# Altium PCB MIXR - Power.PcbDoc (part 3 of 4)
Units mm, origin at the board's own origin, x right, y up, seen from the top; angles counter-clockwise.
Board outline 109.43 x 109.43 mm, 2 copper layers (Top Layer, Bottom Layer), stack 1.569 mm thick; 131 components, 82 nets, 420 pads, 247 vias.
Unrouted connection lines stored in the file: 102.
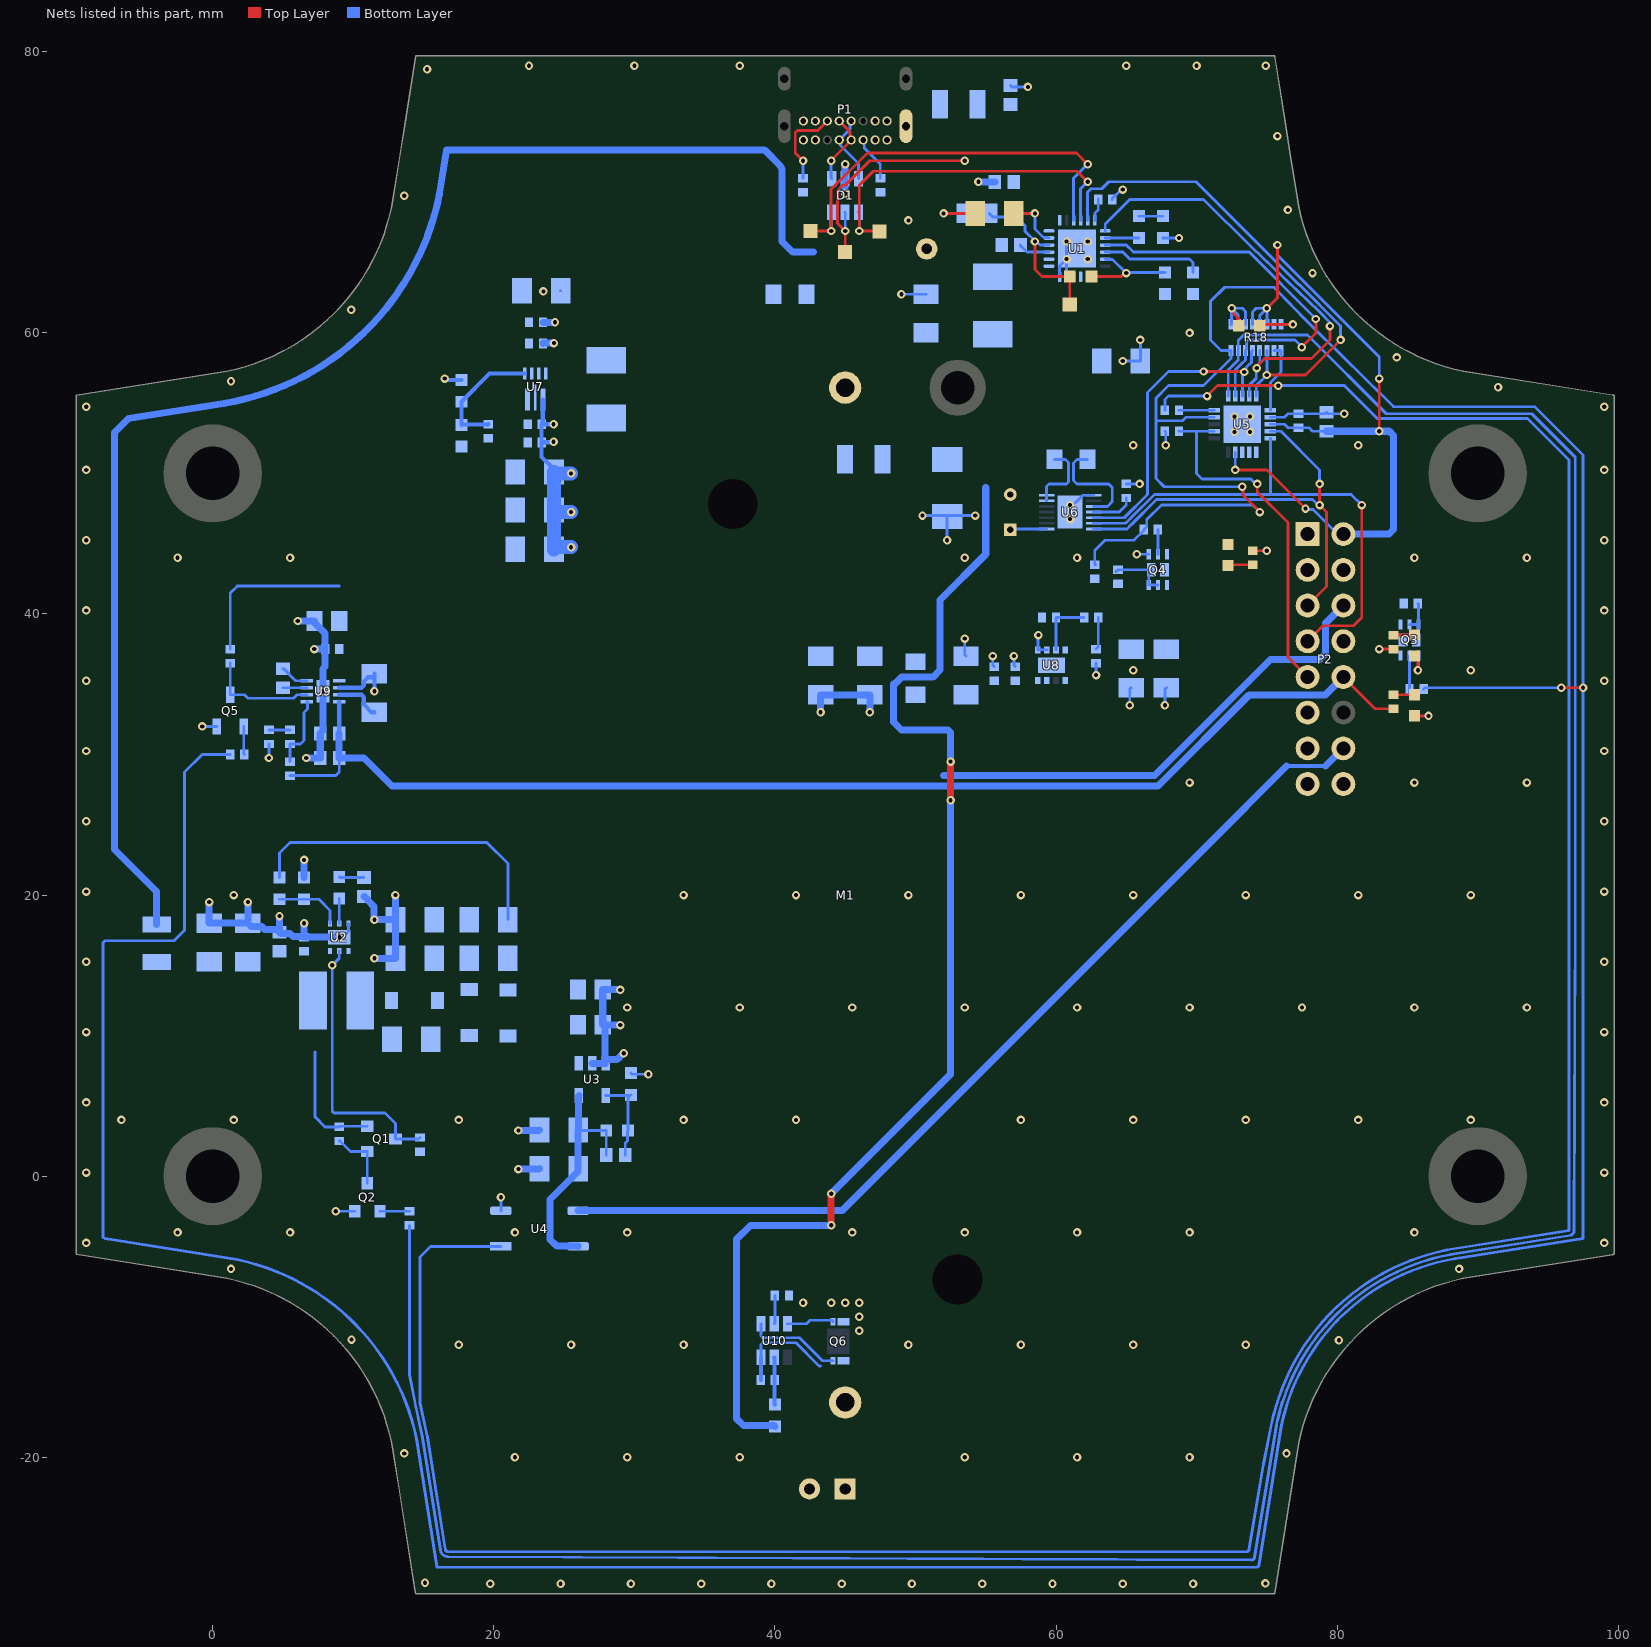
[diagram p2: the nets of this part, all layers, seen from the top]

## Part data (continued)
R25: "Thin Film Resistors - SMD 1/16W 100K ohm .1% 25ppm", Case Code (Imperial)=0402, Case Code (Metric)=1005, Manufacturer=Yageo, Manufacturer Part Number=RT0402BRD07100KL, Max Operating Temperature=125°C, Max Power Dissipation=63mW, Min Operating Temperature=-55°C, Power Rating=62.5mW, Resistance=100K, Supplier Part Number 1=YAG1343CT-ND, Temperature Coefficient=25ppm/°C, Tolerance=0.1%, Voltage Rating=50V, Case/Package=0402, Category="Chip SMD Resistors", ComponentLink1Description=https://datasheet.ciiva.com/12724/pyu-rt-1-to-0-05-rohs-l-4-12724954.pdf?src-supplier=Mouser, ComponentLink1URL=https://datasheet.ciiva.com/12724/pyu-rt-1-to-0-05-rohs-l-4-12724954.pdf?src-supplier=Mouser, Composition="Thin Film", Depth=0.5mm, Features="Moisture Resistant", Height=0.014inch, Lead Free="Lead Free", Length=0.039inch, Military Standard=Not, Number of Terminations=2, Packaging="Tape and Reel", Pricing 1="1=0.41000, 10=0.29200, 100=0.11690, 1000=0.05762, 2500=0.05338, 5000=0.04830 (USD)", RoHS=Yes, Stock 1=83152, Supplier 1=Digi-Key, Termination=SMD/SMT, Voltage Rating (DC)=50V, Width=0.02inch
R28 R36: "Thick Film Resistors 523K OHM 1%", Case Code (Imperial)=0402, Case Code (Metric)=1005, Manufacturer=Yageo, Manufacturer Part Number=RC0402FR-07523KL, Max Operating Temperature=155°C, Max Power Dissipation=63mW, Min Operating Temperature=-55°C, Power Rating=62.5mW, Resistance=523K, Supplier Part Number 1=YAG3177CT-ND, Temperature Coefficient=100ppm/°C, Tolerance=1%, Voltage Rating=50V, Case/Package=0402, Category="Chip SMD Resistors", ComponentLink1Description=https://datasheet.ciiva.com/8885/pyu-rc0402-51-rohs-l-6-8885398.pdf?src-supplier=Avnet, ComponentLink1URL=https://datasheet.ciiva.com/8885/pyu-rc0402-51-rohs-l-6-8885398.pdf?src-supplier=Avnet, ComponentLink2Description=https://datasheet.ciiva.com/16867/pyu-rc0402-51-rohs-l-6-16867910.pdf?src-supplier=Avnet+Europe, ComponentLink2URL=https://datasheet.ciiva.com/16867/pyu-rc0402-51-rohs-l-6-16867910.pdf?src-supplier=Avnet+Europe, ComponentLink3Description=https://datasheet.ciiva.com/12577/pyu-rc0402-51-rohs-l-6-r-12577464.pdf?src-supplier=Mouser, ComponentLink3URL=https://datasheet.ciiva.com/12577/pyu-rc0402-51-rohs-l-6-r-12577464.pdf?src-supplier=Mouser, ComponentLink4Description=https://datasheet.ciiva.com/28389/pyu-rc0402-51-rohs-l-6-28389900.pdf?src-supplier=Avnet+Europe, ComponentLink4URL=https://datasheet.ciiva.com/28389/pyu-rc0402-51-rohs-l-6-28389900.pdf?src-supplier=Avnet+Europe, Composition="Thick Film", Contact Plating=Tin,Matte, Depth=0.5mm, Features="Moisture Resistant", Height=0.016inch, Lead Free="Lead Free", Length=1mm, Military Standard=Not, Number of Terminations=2, Packaging="Tape and Reel", Pricing 1="1=0.10000, 10=0.01600, 100=0.00640, 1000=0.00289, 2500=0.00251, 5000=0.00207 (USD)", RoHS=Yes, Stock 1=24455, Supplier 1=Digi-Key, Termination=SMD/SMT, Voltage Rating (DC)=50V, Weight=2.3E-05oz, Width=0.5mm
R33 R34 R35: "YAGEO (PHYCOMP) - RC0402FR-074K7L - RES, THICK FILM, 4K7, 1%, 0.063W, 0402", Case Code (Imperial)=0402, Case Code (Metric)=1005, Manufacturer=Yageo, Manufacturer Part Number=RC0402FR-074K7L, Max Operating Temperature=155°C, Min Operating Temperature=-55°C, Power Rating=62.5mW, Resistance=4K7, Supplier Part Number 1=311-4.7KLRCT-ND, Temperature Coefficient=100ppm/°C, Tolerance=1%, Voltage Rating=50V, Case/Package=0402, Category="Chip SMD Resistors", ComponentLink1Description=https://datasheet.ciiva.com/7850/1018594-7850022.pdf?src-supplier=Element14, ComponentLink1URL=https://datasheet.ciiva.com/7850/1018594-7850022.pdf?src-supplier=Element14, ComponentLink2Description=https://datasheet.ciiva.com/7850/1018594-7850023.pdf?src-supplier=Element14, ComponentLink2URL=https://datasheet.ciiva.com/7850/1018594-7850023.pdf?src-supplier=Element14, ComponentLink3Description=https://datasheet.ciiva.com/15215/getdatasheetpartid-328119-15215035.pdf?src-supplier=Verical, ComponentLink3URL=https://datasheet.ciiva.com/15215/getdatasheetpartid-328119-15215035.pdf?src-supplier=Verical, ComponentLink4Description=https://datasheet.ciiva.com/22661/1686128-22661342.pdf?src-supplier=Element14, ComponentLink4URL=https://datasheet.ciiva.com/22661/1686128-22661342.pdf?src-supplier=Element14, Composition="Thick Film", Depth=0.5mm, Height=0.32mm, Lead Free="Lead Free", Length=1mm, Military Standard=Not, Number of Pins=2, Packaging="Tape and Reel", Pricing 1="1=0.10000, 10=0.01600, 100=0.00640, 1000=0.00289, 2500=0.00251, 5000=0.00207 (USD)", REACH SVHC="No SVHC", RoHS=Yes, Stock 1=11223879, Supplier 1=Digi-Key, Termination=SMD/SMT, Voltage Rating (DC)=50V, Width=0.5mm
R41: "330 Ohms ±1% 0.1W, 1/10W Chip Resistor 0603 (1608 Metric) Automotive AEC-Q200, Moisture Resistant Thick Film", Manufacturer="TE Connectivity", Manufacturer Part Number=330R, Supplier Part Number 1=A129682CT-ND, ComponentLink1Description=http://www.te.com/commerce/DocumentDelivery/DDEController?Action=srchrtrv&DocNm=1773204-3&DocType=DS&DocLang=English&src-supplier=Digi-Key, ComponentLink1URL=http://www.te.com/commerce/DocumentDelivery/DDEController?Action=srchrtrv&DocNm=1773204-3&DocType=DS&DocLang=English&src-supplier=Digi-Key, ComponentLink2Description=https://www.te.com/commerce/DocumentDelivery/DDEController?Action=srchrtrv&DocNm=1773204-3&DocType=DS&DocLang=English&src-supplier=Digi-Key, ComponentLink2URL=https://www.te.com/commerce/DocumentDelivery/DDEController?Action=srchrtrv&DocNm=1773204-3&DocType=DS&DocLang=English&src-supplier=Digi-Key, Pricing 1="1 = 0.10000, 10 = 0.03300, 100 = 0.01320, 1000 = 0.00595, 2500 = 0.00516 (USD)", RoHS=No, Stock 1=87700, Supplier 1=Digi-Key
R42: "2.7 kOhms ±1% 0.1W, 1/10W Chip Resistor 0402 (1005 Metric) Automotive AEC-Q200 Thick Film", Case Code (Imperial)=0402, Case Code (Metric)=1005, Manufacturer=Panasonic, Manufacturer Part Number=ERJ-2RKF2701X, Max Operating Temperature=155°C, Max Power Dissipation=100mW, Min Operating Temperature=-55°C, Package Quantity=1, Resistance=2K7, Supplier Part Number 1=P2.70KLCT-ND, Temperature Coefficient=100ppm/°C, Tolerance=1%, Voltage Rating=50V, Case/Package=0402, Category="Chip SMD Resistors", ComponentLink1Description=https://datasheet.ciiva.com/3883/3984280s8821682n1386-3883650.pdf?src-supplier=Arrow, ComponentLink1URL=https://datasheet.ciiva.com/3883/3984280s8821682n1386-3883650.pdf?src-supplier=Arrow, ComponentLink2Description=https://datasheet.ciiva.com/11821/0900766b80f80784-11821269.pdf?src-supplier=RSComponents, ComponentLink2URL=https://datasheet.ciiva.com/11821/0900766b80f80784-11821269.pdf?src-supplier=RSComponents, ComponentLink3Description=https://datasheet.ciiva.com/22668/1678782-22668310.pdf?src-supplier=Element14, ComponentLink3URL=https://datasheet.ciiva.com/22668/1678782-22668310.pdf?src-supplier=Element14, ComponentLink4Description=https://datasheet.ciiva.com/24071/aoa0000ce2-24071174.pdf?src-supplier=Mouser, ComponentLink4URL=https://datasheet.ciiva.com/24071/aoa0000ce2-24071174.pdf?src-supplier=Mouser, ComponentLink5Description=https://datasheet.ciiva.com/7802/aoa0000ce2-7802407.pdf?src-supplier=Element14, ComponentLink5URL=https://datasheet.ciiva.com/7802/aoa0000ce2-7802407.pdf?src-supplier=Element14, ComponentLink6Description=https://datasheet.ciiva.com/9196/aoa0000ce2-9196887.pdf?src-supplier=Avnet, ComponentLink6URL=https://datasheet.ciiva.com/9196/aoa0000ce2-9196887.pdf?src-supplier=Avnet, ComponentLink7Description=https://datasheet.ciiva.com/43467/1678782-43467351.pdf?src-supplier=Farnell, ComponentLink7URL=https://datasheet.ciiva.com/43467/1678782-43467351.pdf?src-supplier=Farnell, ComponentLink8Description=https://datasheet.ciiva.com/46372/1678782-46372856.pdf?src-supplier=Element14, ComponentLink8URL=https://datasheet.ciiva.com/46372/1678782-46372856.pdf?src-supplier=Element14, ComponentLink9Description=https://datasheet.ciiva.com/16775/70260748-16775161.pdf?src-supplier=Allied+Electronics, ComponentLink9URL=https://datasheet.ciiva.com/16775/70260748-16775161.pdf?src-supplier=Allied+Electronics, ComponentLink10Description=https://datasheet.ciiva.com/16778/70260748-16778345.pdf?src-supplier=Allied+Electronics, ComponentLink10URL=https://datasheet.ciiva.com/16778/70260748-16778345.pdf?src-supplier=Allied+Electronics, ComponentLink11Description=https://datasheet.ciiva.com/46372/1678782-46372857.pdf?src-supplier=Element14, ComponentLink11URL=https://datasheet.ciiva.com/46372/1678782-46372857.pdf?src-supplier=Element14, ComponentLink12Description=https://datasheet.ciiva.com/6138/aoa0000ce2-6138171.pdf?src-supplier=Farnell, ComponentLink12URL=https://datasheet.ciiva.com/6138/aoa0000ce2-6138171.pdf?src-supplier=Farnell, ComponentLink13Description=https://datasheet.ciiva.com/22687/1678782-22687069.pdf?src-supplier=Element14, ComponentLink13URL=https://datasheet.ciiva.com/22687/1678782-22687069.pdf?src-supplier=Element14, ComponentLink14Description=https://datasheet.ciiva.com/17213/aoa0000ce2-17213982.pdf?src-supplier=Avnet+Europe, ComponentLink14URL=https://datasheet.ciiva.com/17213/aoa0000ce2-17213982.pdf?src-supplier=Avnet+Europe, Composition="Thick Film", Contact Plating=Tin, Depth=0.5mm, Features="Automotive AEC-Q200", Height=0.35mm, Lead Free="Lead Free", Length=1mm, Military Standard=Not, Mount="Surface Mount", Number of Pins=2, Number of Terminations=2, Packaging="Tape and Reel", Power Rating=100mW, Pricing 1="1=0.10000, 10=0.04100, 100=0.01670, 1000=0.00751, 2500=0.00652, 5000=0.00538 (USD)", Radiation Hardening=No, REACH SVHC="No SVHC", RoHS=Yes, Stock 1=344590, Supplier 1=Digi-Key, Termination=SMD/SMT, Voltage Rating (DC)=50V, Width=0.02inch
RT1: library part "NTC THERMISTOR 10K 1% BEAD", "NTC Thermistor 10k Bead", B Value Tolerance=±1%, Manufacturer="Murata Electronics North America", Manufacturer Part Number=NXRT15XH103FA1B030, Operating Temperature="-40°C ~ 125°C", Package / Case=Bead, Resistance in Ohms @ 25°C=10k, Supplier Part Number 1=490-8601-ND, B0/50=-, B25/50=3380K, B25/75=-, B25/85=3434K, B25/100=3455K, Category="Sensors, Transducers", ComponentLink1Description=https://www.murata.com/~/media/webrenewal/support/library/catalog/products/thermistor/ntc/r44e.ashx, ComponentLink1URL=https://www.murata.com/~/media/webrenewal/support/library/catalog/products/thermistor/ntc/r44e.ashx, Length - Lead Wire=-, Mounting Type="Through Hole", Packaging=Bulk, Part Status=Active, Pricing 1="1=0.96, 5=0.91, 10=0.792, 25=0.696, 50=0.5784, 100=0.4925, 500=0.42834, 1000=0.3748, 5000=0.33197 (CAD)", Resistance Tolerance=±1%, RoHS="RoHS Compliant", Stock 1=25017, Supplier 1=Digi-Key
U1: "Charger IC Lithium Ion/Polymer 24-VQFN (4x4)", Manufacturer="Texas Instruments", Manufacturer Part Number=BQ25606RGER, Supplier Part Number 1=296-47743-1-ND, ComponentLink1Description=http://www.ti.com/lit/ds/symlink/bq25606.pdf?src-supplier=Digi-Key, ComponentLink1URL=http://www.ti.com/lit/ds/symlink/bq25606.pdf?src-supplier=Digi-Key, Number of Cells=1, Pricing 1="1 = 2.76000, 10 = 2.48100, 100 = 2.03260, 500 = 1.73032, 1000 = 1.45930 (USD)", RoHS=No, Stock 1=8983, Supplier 1=Digi-Key
U2: "Boost, Buck-Boost, Flyback, SEPIC Switching Regulator IC Positive Adjustable 3V 1 Output 960mA (Switch) 6-WDFN Exposed Pad", Case/Package=QFN, Manufacturer="Texas Instruments", Manufacturer Part Number=TPS61170DRVR, Max Input Voltage=18V, Max Operating Temperature=85°C, Max Output Current=960mA, Max Output Voltage=38V, Min Input Voltage=3V, Min Operating Temperature=-40°C, Nominal Supply Current=2.2mA, Output Current=1.2A, Package Quantity=1, Quiescent Current=2.3mA, Supplier Part Number 1=296-22945-1-ND, Switching Frequency=1.2MHz, Category="Voltage Regulators - Switching", ComponentLink1Description=https://datasheet.ciiva.com/7115/1764435-7115937.pdf?src-supplier=Newark, ComponentLink1URL=https://datasheet.ciiva.com/7115/1764435-7115937.pdf?src-supplier=Newark, ComponentLink2Description=https://datasheet.ciiva.com/41462/001014890-da-01-en-ic-reg-multi-con-tps61170drvr-wson-6-tid-41462735.pdf?src-supplier=Conrad, ComponentLink2URL=https://datasheet.ciiva.com/41462/001014890-da-01-en-ic-reg-multi-con-tps61170drvr-wson-6-tid-41462735.pdf?src-supplier=Conrad, ComponentLink3Description=https://datasheet.ciiva.com/2025/tps61170-2025720.pdf?src-supplier=Digi-Key, ComponentLink3URL=https://datasheet.ciiva.com/2025/tps61170-2025720.pdf?src-supplier=Digi-Key, ComponentLink4Description=https://datasheet.ciiva.com/2025/tps61170-2025721.pdf?src-supplier=Digi-Key, ComponentLink4URL=https://datasheet.ciiva.com/2025/tps61170-2025721.pdf?src-supplier=Digi-Key, ComponentLink5Description=https://datasheet.ciiva.com/15223/getdatasheetpartid-294050-15223093.pdf?src-supplier=Verical, ComponentLink5URL=https://datasheet.ciiva.com/15223/getdatasheetpartid-294050-15223093.pdf?src-supplier=Verical, ComponentLink6Description=https://datasheet.ciiva.com/2025/tps61170-2025719.pdf?src-supplier=Digi-Key, ComponentLink6URL=https://datasheet.ciiva.com/2025/tps61170-2025719.pdf?src-supplier=Digi-Key, Efficiency=93%, Lead Free="Lead Free", Min Output Voltage=3V, Number of Outputs=1, Number of Pins=6, Operating Supply Voltage=18V, Output Configuration=Positive, Output Type=Adjustable, Output Voltage=38V, Packaging="Tape and Reel", Pricing 1="1=2.14000, 10=1.92200, 25=1.81280, 100=1.45020, 250=1.26896, 500=1.23270, 1000=0.97891 (USD)", Radiation Hardening=No, REACH SVHC="No SVHC", RoHS=Yes, Stock 1=61005, Supplier 1=Digi-Key, Synchronous Rectifier=No, Topology=Boost
U3: "Linear Voltage Regulator IC 1 Output 20mA SOT-23-5", Manufacturer=Richtek, Manufacturer Part Number=RT9072BGB, Supplier Part Number 1=RT9072BGBCT-ND, ComponentLink1Description=http://www.richtek.com/assets/product_file/RT9072A=RT9072B/DS9072AB-01.pdf?src-supplier=Digi-Key, ComponentLink1URL=http://www.richtek.com/assets/product_file/RT9072A=RT9072B/DS9072AB-01.pdf?src-supplier=Digi-Key, ComponentLink2Description=https://www.richtek.com/assets/product_file/RT9072A=RT9072B/DS9072AB-01.pdf?src-supplier=Digi-Key, ComponentLink2URL=https://www.richtek.com/assets/product_file/RT9072A=RT9072B/DS9072AB-01.pdf?src-supplier=Digi-Key, Pricing 1="1=1.34000, 10=1.19700, 25=1.13640, 100=0.87250, 250=0.77104, 500=0.73048, 1000=0.56815 (USD)", RoHS=No, Stock 1=495, Supplier 1=Digi-Key
U4: library part "RELAY SOLID STATE CPC1017N SPST 100mA", "Relay Solid-State SPST-NO 4-SOP", Manufacturer="IXYS Integrated Circuits Division", Manufacturer Part Number=CPC1017NTR, On-State Resistance (Max)="16 Ohm", Package / Case="4-SOP (0.150\", 3.81mm)", Supplier Device Package="4-SOP (2.54mm)", Supplier Part Number 1=CLA233CT-ND, Voltage - Input=1.2VDC, Voltage - Load="0 ~ 60 V", Category=Relays, Circuit="SPST-NO (1 Form A)", ComponentLink1Description=http://www.ixysic.com/home/pdfs.nsf/www/CPC1017N.pdf/$file/CPC1017N.pdf, ComponentLink1URL=http://www.ixysic.com/home/pdfs.nsf/www/CPC1017N.pdf/$file/CPC1017N.pdf, Mounting Type="Surface Mount", Output Type="AC, DC", Packaging="Cut Tape (CT)", Part Status=Active, Pricing 1="1=1.76, 10=1.561, 25=1.41, 100=1.2334, 250=1.0824, 500=0.95658, 1000=0.75519 (CAD)", Relay Type=Relay, RoHS="RoHS Compliant", Stock 1=86929, Supplier 1=Digi-Key, Termination Style="Gull Wing"
U5: library part "IC I/O EXPANDER I2C 8CH 20 QFN", "I/O Expander 8 I²C 1.7MHz 20-QFN-EP (4x4)", Case/Package=QFN, Frequency=1.7MHz, Manufacturer 1=Microchip, Manufacturer Part Number 1=MCP23008T-E/ML, Max Operating Temperature=125°C, Min Operating Temperature=-40°C, Operating Supply Voltage=5.5V, Package Quantity=3300, Power Dissipation=700mW, Supplier Part Number 1=MCP23008T-E/MLCT-ND, ComponentLink1Description=http://www.microchip.com/mymicrochip/filehandler.aspx?ddocname=en021920, ComponentLink1URL=http://www.microchip.com/mymicrochip/filehandler.aspx?ddocname=en021920, ComponentLink2Description=https://datasheet.ciiva.com/16617/21919e-16617627.pdf?src-supplier=Avnet+Europe, ComponentLink2URL=https://datasheet.ciiva.com/16617/21919e-16617627.pdf?src-supplier=Avnet+Europe, ComponentLink3Description=https://datasheet.ciiva.com/12267/21919e-12267580.pdf?src-supplier=Mouser, ComponentLink3URL=https://datasheet.ciiva.com/12267/21919e-12267580.pdf?src-supplier=Mouser, ComponentLink4Description=https://datasheet.ciiva.com/8128/21919e-8128685.pdf?src-supplier=Avnet, ComponentLink4URL=https://datasheet.ciiva.com/8128/21919e-8128685.pdf?src-supplier=Avnet, Interface=I2C,Serial, Lead Free="Lead Free", Max Frequency=1.7MHz, Number of I/Os=8, Packaging="Tape and Reel", Pricing 1="1=1.10000, 25=0.92000, 100=0.84000 (USD)", RoHS=Yes, Stock 1=3994, Supplier 1=Digi-Key
U6: "Battery Management 5.1 A 1-Cell Fuel Gauge with ModelGauge m5 EZ and Optional High-SideCurrent Sensing", Manufacturer=Maxim, Manufacturer Part Number=MAX17260SETD+T, Supplier Part Number 1=700-MAX17260SETD+T, Pricing 1="1=2.39000, 10=2.26000, 25=1.80000, 50=1.71000, 100=1.58000, 250=1.50000, 500=1.45000, 1000=1.31000, 2500=1.07000 (USD)", RoHS=No, Stock 1=3038, Supplier 1=Mouser
U7: "Boost Switching Regulator IC Positive Adjustable 2.2V 1 Output 7-VFQFN", Manufacturer="Texas Instruments", Manufacturer Part Number=TPS61022RWUT, Supplier Part Number 1=296-TPS61022RWUTCT-ND, Pricing 1="1=2.00000, 10=1.79600, 25=1.69440, 100=1.35550 (USD)", RoHS=No, Stock 1=738, Supplier 1=Digi-Key
U8: "Non-Isolated PoL Module DC DC Converter 1 Output 0.8 ~ 6V 2A 2.5V - 6V Input", Case/Package=Module, Manufacturer="Texas Instruments", Manufacturer Part Number=TPS82084SILR, Max Input Voltage=6V, Max Operating Temperature=125°C, Max Output Current=2A, Min Input Voltage=2.5V, Min Operating Temperature=-40°C, Min Output Voltage=800mV, Quiescent Current=17uA, Supplier Part Number 1=296-46279-1-ND, Switching Frequency=2.4MHz, ComponentLink1Description=http://www.ti.com/lit/ds/symlink/tps82084.pdf?src-supplier=Digi-Key, ComponentLink1URL=http://www.ti.com/lit/ds/symlink/tps82084.pdf?src-supplier=Digi-Key, ComponentLink2Description=http://www.ti.com/general/docs/lit/getliterature.tsp?genericPartNumber=TPS82084&&fileType=pdf&src-supplier=Avnet, ComponentLink2URL=http://www.ti.com/general/docs/lit/getliterature.tsp?genericPartNumber=TPS82084&&fileType=pdf&src-supplier=Avnet, Efficiency=95%, Lead Free="Lead Free", Max Output Voltage=6V, Mount="Surface Mount", Number of Outputs=1, Number of Pins=8, Operating Supply Voltage=6V, Output Configuration=Positive, Output Current=2A, Output Type=Adjustable, Output Voltage=6V, Packaging="Tape and Reel", Pricing 1="1 = 3.12000, 10 = 2.80400, 100 = 2.29770, 500 = 1.95602, 1000 = 1.64965 (USD)", RoHS=Yes, Stock 1=31772, Supplier 1=Digi-Key, Synchronous Rectifier=Yes
U9: "Charge Pump Switching Regulator IC Negative Adjustable -1.5V 1 Output 250mA 8-WFDFN Exposed Pad", Manufacturer="Texas Instruments", Manufacturer Part Number=LM27761DSGR, Max Operating Temperature=85°C, Min Operating Temperature=-40°C, Quiescent Current=370uA, Supplier Part Number 1=296-44379-1-ND, Category="Voltage Regulators - Switching", ComponentLink1Description=http://www.ti.com/lit/ds/symlink/lm27761.pdf?src-supplier=Newark, ComponentLink1URL=http://www.ti.com/lit/ds/symlink/lm27761.pdf?src-supplier=Newark, ComponentLink2Description=http://www.ti.com/lit/ds/symlink/lm27761.pdf?src-supplier=Farnell, ComponentLink2URL=http://www.ti.com/lit/ds/symlink/lm27761.pdf?src-supplier=Farnell, ComponentLink3Description=http://www.ti.com/lit/ds/symlink/lm27761.pdf?src-supplier=Digi-Key, ComponentLink3URL=http://www.ti.com/lit/ds/symlink/lm27761.pdf?src-supplier=Digi-Key, ComponentLink4Description=http://www.ti.com/lit/gpn/lm27761?src-supplier=Mouser, ComponentLink4URL=http://www.ti.com/lit/gpn/lm27761?src-supplier=Mouser, Lead Free="Lead Free", Pricing 1="1=1.63000, 10=1.46600, 25=1.38280, 100=1.10620, 250=0.96796, 500=0.94028, 1000=0.74670 (USD)", RoHS=No, Stock 1=11534, Supplier 1=Digi-Key
U10: "Battery Battery Protection IC Lithium Ion/Polymer SOT-26", Manufacturer=Diodes, Manufacturer Part Number=AP9101CK6-AYTRG1, Supplier Part Number 1=AP9101CK6-AYTRG1DICT-ND, Pricing 1="1=0.45000, 10=0.36700, 100=0.24960, 500=0.18720, 1000=0.14040 (USD)", RoHS=No, Stock 1=3484, Supplier 1=Digi-Key

## Free pads (board coordinates)
  round 7 hole 3.8: 7(0,0) 7(0,50) 7(90,0) 7(90,50)

## Via types
v1: diameter 0.6, hole 0.3, Top Layer to Bottom Layer, tented both sides, 187 vias
v2: diameter 0.6, hole 0.3, Top Layer to Bottom Layer, 60 vias

## Nets (pads, with @x,y where several pads share a name; then routed paths per layer and width w, separated by ;. In a path a pad name is that pad's centre, name@x,y a point inside that pad or via, vN(x,y) a via of type N, cw(c..) or ccw(c..) an arc to the next point about the centre after c; other vN are vias at no path point)
3V3: C23.1 C24.1 C42.1 C43.1 C44.1 P2.15 P2.16 Q4.4 R18.4 R18.5 R18.6 R28.1 R29.1 R30.1 U5.4 U5.18 U8.8 | length 58.2
  Top Layer w0.2: v1(72.75,50.25) 75,50.25 v1(77.75,47.5) ; v1(75,61.75) 75.75,62.5 v1(75.75,66.25) ; v1(83,53) v1(83,56.75)
  Bottom Layer w0.2: C42.1@62.85,37.5 63,37.65 R28.1@63,39.75 ; v1(72.75,50.25) U5.4@72.75,51.5 ; R18.4@73.984,60.604 73.984,61.484 74.25,61.75 v1(75,61.75) ; R18.5@74.492,60.604 74.492,61.242 v1(75,61.75) ; R18.6@75,60.604 v1(75,61.75) ; U5.18@75.25,53.5 76.25,53.5 76.5,53.25 C24.1@77.25,53.25 78,53.25 78.25,53 C23.1@79.25,53 ; v1(75.75,66.25) 75.75,65.525 83,58.275 v1(83,56.75) ; v1(77.75,47.5) 77.827,47.423 78.295,47.423 80.039,45.68 P2.16@80.44,45.68
  Bottom Layer w0.5: C23.1@79.25,53 v1(83,53) 83.707,53 84,52.707 84,46 83.68,45.68 P2.16@80.44,45.68
3V3_SW: P2.1 P2.2 Q4.3 R35.1 | length 1
  Top Layer w0.2: R35.1@74,44.5 v1(75,44.5)
48V: C18.1 C19.1 C20.1 R15.1 U3.5 U4.4 | length 17
  Bottom Layer w0.2: C18.1@26.025,3.305 26.08,3.25 R15.1@28,3.25 C20.1@28,1.5
  Bottom Layer w0.5: U4.4@26,-5 25.979,-4.979 24.479,-4.979 24,-4.5 24,-1.67 26,0.33 C19.1@26,0.53 C18.1@26,3.28 26.025,3.305 26.025,5.705 U3.5@26.05,5.73
48V_SW: P2.10 U4.3 | length 68.1
  Bottom Layer w0.3: 76.4,29.175 79.175,29.175
  Bottom Layer w0.5: U4.3@26,-2.46 44.765,-2.46 70.725,23.5 76.4,29.175 ; 79.175,29.175 P2.10@80.44,30.44
49V2: C9.1 C10.1 C21.1 C22.1 D2.1 R9.1 U3.1 | length 22.9
  Bottom Layer w0.2: R9.1@4.75,21.25 4.75,23 5.5,23.75 19.5,23.75 21,22.25 C10.1@21,18.25
49V2_EN: Q1.3 R14.1 U2.5 | length 19.4
  Bottom Layer w0.2: U2.5@9,16.025 9,15.5 v1(8.5,15) 8.5,4.617 8.617,4.5 12.25,4.5 13,3.75 Q1.3@13,2.65 14.65,2.65 R14.1@14.75,2.75
+5V: C28.1 C32.1 C33.1 C34.1 C35.1 C36.1 C39.1 C40.1 C45.1 C46.1 P2.14 Q3.4 R22.1 R23.1 R27.1 R37.1 U7.3 U9.1 | length 46.7
  Bottom Layer w0.2: R37.1@1.25,37.5 1.25,41.5 1.75,42 9,42
  Bottom Layer w0.5: 52,28.5 67,28.5 75.25,36.75 77.359,36.75 77.381,36.772 78.772,36.772 79.188,37.188 79.188,39.348 P2.14@80.44,40.6
+5V_SW: P2.13 Q3.3 R34.1 | length 1
  Top Layer w0.2: v1(83,37.5) R34.1@84,37.5
-5V_SW: C48.1 C49.1 P2.12 R33.1 R36.1 U9.4 | length 88.6
  Top Layer w0.2: P2.12@80.44,35.52 82.71,33.25 R33.1@84,33.25
  Bottom Layer w0.2: R36.1@5.5,28.5 8.75,28.5 9,28.75 C49.1@9,29.75
  Bottom Layer w0.3: C48.1@9,31.5 U9.4@9,33.75
  Bottom Layer w0.5: C48.1@9,31.5 C49.1@9,29.75 10.75,29.75 12.75,27.75 67.25,27.75 73.75,34.25 79.17,34.25 P2.12@80.44,35.52
ESP32_IO21_I2C1_SDA: P2.4 U5.20 U6.13 | length 36.8
  Top Layer w0.2: P2.4@77.9,38.06 79.002,39.162 81.162,39.162 81.75,39.75 v1(81.75,47.75)
  Bottom Layer w0.2: U6.13@62.675,46.45 64.952,46.45 65.199,46.698 65.205,46.698 65.352,46.845 65.352,46.851 67.002,48.5 75.25,48.5 ; U5.20@75.25,52.5 75.25,48.5 ; v1(81.75,47.75) 81,48.5 75.25,48.5
ESP32_IO22_I2C1_SCL: P2.3 U5.19 U6.14 | length 32.2
  Top Layer w0.2: P2.3@77.9,40.6 79.25,41.95 79.25,47.25 v1(78.75,47.75) v1(78.75,49.25)
  Bottom Layer w0.2: U6.14@62.675,46.05 65.05,46.05 65.345,46.345 65.351,46.345 67.153,48.148 78.25,48.148 78.648,47.75 v1(78.75,47.75) ; U5.19@75.25,53 76,53 78.75,50.25 v1(78.75,49.25)
ESP32_IO26_POWER_I2C_PE_INT: P2.5 R19.2 U5.7 | length 25.3
  Top Layer w0.2: v1(74.315,49.25) 74.315,48.685 76.5,46.5 76.5,36.92 P2.5@77.9,35.52
  Bottom Layer w0.2: R19.2@68.75,53 70,53 ; U5.7@71.25,53 70,53 ; v1(74.315,49.25) 74.207,49.25 73.852,49.605 70.395,49.605 70,50 70,53
ESP32_PWR_PE_GP0_nSW_EN: R18.16 R26.1 R30.2 R32.1 R39.1 U5.9 | length 320
  Top Layer w0.2: v1(73.25,49.052) 73.298,49.005 73.298,48.452 v1(74.5,47.25) ; v1(95.948,34.75) v1(97.5,34.75)
  Bottom Layer w0.2: -7.8,-4.367 -7.8,16.55 cw(c-7.6,16.55) -7.6,16.75 -2.75,16.75 -2,17.5 -2,28.75 -0.75,30 R39.1@1.25,30 ; -7.662,-4.438 1.716,-5.935 1.72,-5.936 cw(c-1.63,-22.082) 14.5,-18.656 14.502,-18.661 15.953,-27.825 74.248,-27.825 ccw(c74.248,-27.625) 74.446,-27.657 76.008,-17.872 76.009,-17.868 cw(c90.915,-20.866) 88.447,-5.863 97.5,-4.429 v1(97.5,34.75) 97.5,51.3 94.05,54.75 84.006,54.75 78.256,60.433 77.933,60.756 75.617,63.133 75.5,63.25 72,63.25 71,62.25 71,59.5 71.75,58.75 R18.16@72.46,58.75 72.438,58.728 72.438,58.188 70.5,56.25 68,56.25 67.102,55.352 67.102,53.633 ; R30.2@62.8,43.5 R30.2@62.75,43.5 62.75,44.5 63.5,45.25 65.55,45.25 66.25,45.95 R32.1@66.25,46 66.45,46.2 66.45,46.7 67.5,47.75 74,47.75 v1(74.5,47.25) ; U5.9@71.25,54 69.257,54 69.007,53.75 67.22,53.75 67.102,53.633 ; v1(73.25,49.052) 67.698,49.052 67.102,49.648 67.102,53.633 ; R26.1@86.15,34.65 86.25,34.75 v1(95.948,34.75)
ESP32_PWR_PE_GP1_PHANTOM_PWR_EN: R17.1 U5.10 | length 2.5
  Bottom Layer w0.2: R17.1@68.75,54.5 U5.10@71.25,54.5
ESP32_PWR_PE_GP2_49V2_REG_EN: R13.1 R18.15 U5.11 | length 205.6
  Bottom Layer w0.2: R13.1@14,-3.5 14,-14.084 ccw(c14.2,-14.084) 14.004,-14.122 14.408,-16.193 ccw(c14.95,-16.086) 14.41,-16.203 14.926,-18.587 cw(c14.582,-18.663) 14.93,-18.608 16.198,-26.612 ccw(c16.743,-26.525) 16.741,-27.077 73.921,-27.3 ccw(c73.921,-27.1) 74.118,-27.133 75.677,-17.71 75.678,-17.703 75.7,-17.609 75.705,-17.586 75.762,-17.341 cw(c90.915,-20.866) 88.105,-5.565 88.279,-5.533 96.662,-4.205 96.852,-4.015 96.948,18.504 96.948,51.152 93.85,54.25 83.5,54.25 77.898,59.852 73.352,59.852 72.968,59.468 R18.15@72.968,58.75 72.968,58.074 72.25,57.356 U5.11@72.25,55.5
ESP32_PWR_PE_GP3_nBAT_CHG_EN: R18.14 U1.9 U5.12 | length 28.1
  Top Layer w0.2: v1(77.484,58.984) 78.5,60 78.5,60.97 v1(78.485,60.985)
  Bottom Layer w0.2: U1.9@63.5,66.25 65,66.25 65.5,65.75 73.75,65.75 78.437,61.063 78.485,61.015 v1(78.485,60.985) ; U5.12@72.75,55.5 72.75,57.358 73.158,57.766 73.173,57.766 73.476,58.069 R18.14@73.476,58.75 73.554,58.828 73.554,59.383 73.671,59.5 77.01,59.5 77.484,59.026 v1(77.484,58.984)
ESP32_PWR_PE_GP4_BAT_GAUGE_ALRT: R18.13 U5.13 U6.12 | length 22.8
  Top Layer w0.2: v1(70.5,57.25) 73.351,57.25 v1(73.387,57.214)
  Bottom Layer w0.2: U6.12@62.675,46.85 64.85,46.85 66.5,48.5 66.5,55.75 68,57.25 v1(70.5,57.25) ; U5.13@73.25,55.5 73.263,55.513 73.263,56.981 73.4,57.118 73.4,57.334 73.525,57.459 73.525,57.525 73.906,57.906 73.906,58.672 R18.13@73.984,58.75
ESP32_PWR_PE_GP5_BAT_CHG_nPG: R18.12 U1.7 U5.14 | length 31.7
  Top Layer w0.2: v1(74.279,57.497) 74.279,57.606 74.852,58.179 78.179,58.179 79.5,59.5 79.5,60.469 v1(79.484,60.484)
  Bottom Layer w0.2: U1.7@63.5,67.25 63.5,67.75 65.25,69.5 70.5,69.5 73.896,66.104 73.896,66.102 78.712,61.539 78.714,61.538 79.539,60.712 v1(79.484,60.484) ; U5.14@73.75,55.5 73.75,56.273 74.25,56.773 74.25,57 ; 74.25,57.052 74.25,57.469 v1(74.279,57.497) ; v1@74.25,57.497 74.25,57.601 74.492,57.843 R18.12@74.492,58.75
ESP32_PWR_PE_GP6_BAT_CHG_STATUS: R18.11 U1.5 U5.15 | length 35.4
  Top Layer w0.2: v1(75,57) 77.75,57 v1(80.25,59.5)
  Bottom Layer w0.2: U1.5@62.25,68 62.25,70.007 62.493,70.25 63.25,70.25 63.75,70.75 69.969,70.75 77.271,63.448 77.302,63.448 80.25,60.5 v1(80.25,59.5) ; U5.15@74.25,55.5 74.25,56.25 v1(75,57) R18.11@75,58.75
ESP32_PWR_PE_GP7_DEBUG_LEG: R18.9 R18.10 U5.16 | length 5.1
  Bottom Layer w0.2: U5.16@75.25,54.5 75.25,56.469 76,57.219 76,58.734 R18.9@76.016,58.75 R18.10@75.508,58.75
GND: C1.2 C2.2 C4.2 C5.2 C6.2 C7.2 C11.2 C12.2 C13.2 C14.2 C15.2 C16.2 C17.2 C18.2 C19.2 C21.2 C22.2 C23.2 C24.2 C27.2 C29.2 C30.2 C31.2 C32.2 C33.2 C34.2 C35.2 C36.2 C37.2 C38.2 C39.2 C40.2 C41.2 C42.2 C43.2 C44.2 C45.2 C46.2 C48.2 C49.2 C50.2 D1.2 D5.1 JP1.2 LED1.2 LED2.1 LED3.2 LED4.2 P1.A1 P1.A12 P1.B1 P1.B12 P1.P1 P2.8 P2.9 Q2.2 Q3.1 Q4.1 Q5.2 Q6.4 R1.2 R2.2 R3.1 R5.2 R7.2 R8.2 R11.2 R14.2 R16.2 R18.1 R18.2 R18.3 R19.1 R25.2 R31.2 R40.2 R42.2 RT1.2 U1.17 U1.18 U1.25 U2.3 U2.7 U3.2 U3.3 U4.2 U5.1 U5.2 U5.3 U5.17 U5.21 U6.8 U6.15 U7.1 U7.6 U8.5 U8.6 U8.9 U9.2 U9.9 | length 139.8
  Top Layer w0.2: v1(52,68.5) C7.2@54.25,68.5 ; v1(72.5,61.75) 72.577,61.673 72.577,61.423 72.917,61.083 72.917,60.583 LED1.2@73,60.5 ; LED2.1@85.5,32.75 v1(86.5,32.75) ; LED3.2@85.5,37 85.75,36.75 v1(85.75,36)
  Bottom Layer w0.2: v1(-0.75,32) Q5.2@0.3,32 ; v1(4,29.75) R40.2@4,30.75 ; v1(8.75,-2.5) Q2.2@10.1,-2.5 ; v1(9,17) 9.25,17 9.65,17.4 U2.3@9.65,17.975 ; U4.2@20.5,-2.46 v1(20.5,-1.5) ; R16.2@29.75,7.33 29.83,7.25 v1(31,7.25) ; v1(49,62.75) C4.2@50.75,62.75 ; v1(50.5,47) 52.186,47 D5.1@52.25,46.936 ; v1(52.25,45.25) D5.1@52.25,46.936 ; v1(53.5,38.25) 53.5,37.1 C41.2@53.6,37 ; v1(54.25,47) 52.314,47 D5.1@52.25,46.936 ; v1(55.5,37) 55.5,36.35 C37.2@55.6,36.25 ; C1.2@56.75,77.6 56.85,77.5 v2(58,77.5) ; v1(57,37) 57,36.35 C38.2@57.1,36.25 ; v1(58.75,38.5) 58.725,38.475 58.725,37.475 U8.5@58.7,37.45 U8.6@59.35,37.45 ; U1.18@60.25,64 60.25,64.75 v1(60.75,65.25) ; U1.17@60.75,64 v1(60.75,65.25) ; v1(60.75,66.5) v1(60.75,65.25) ; U6.15@61,47.25 61,47.535 61.915,48.45 U6.8@62.675,48.45 ; v1(62.85,35.65) C42.2@62.85,36.5 ; R3.1@64,69.5 64,69.55 64.648,70.198 v1(64.75,70.198) ; v1(64.75,58) C6.2@66,58 v1(66,59.5) ; C27.2@65,49.25 v1(65.948,49.25) ; v1(65.25,33.5) 65.25,34.65 C43.2@65.35,34.75 ; v1(65.75,44.25) Q4.1@66.6,44.25 ; R8.2@67.6,66.75 v1(68.75,66.75) ; v1(67.75,33.5) 67.75,34.65 C44.2@67.85,34.75 ; R19.1@67.75,53 67.802,52.948 v1(67.802,52) ; R18.1@72.46,60.604 72.48,60.624 72.48,61.73 v1(72.5,61.75) ; R18.2@72.968,60.604 72.968,61.282 v1(72.5,61.75) ; R18.3@73.476,60.604 73.476,61.524 73.25,61.75 v1(72.5,61.75) ; U5.17@75.25,54 76.25,54 76.5,54.25 C24.2@77.25,54.25 79.15,54.25 C23.2@79.25,54.35 79.35,54.25 v1(80.5,54.25) ; v1(85.75,36) 85.775,36.025 85.775,37.025 Q3.1@85.8,37.05
  Bottom Layer w0.3: U9.2@9,34.75 10.574,34.75 10.75,34.926 10.75,35.2 11.05,35.5 C50.2@11.5,35.5 ; v1(11.5,34.5) C50.2@11.5,35.5 ; C50.2@11.5,35.75 C50.2@11.5,35.5 ; v1(16.5,56.75) 16.581,56.75 16.681,56.65 R25.2@17.7,56.65 ; U7.1@23.5,55.25 23.475,55.225 23.475,53.575 C32.2@23.4,53.5 ; v1(24.25,52.25) 24.225,52.225 23.425,52.225 C33.2@23.4,52.2 ; v1(24.25,53.5) C32.2@23.4,53.5 ; C34.2@24.275,50.1 24.275,50.3 23.4,51.175 C33.2@23.4,52.2 ; C33.2@23.4,52.2 C32.2@23.4,53.5
  Bottom Layer w0.5: v1(-0.25,19.5) C12.2@-0.25,18 C13.2@2.5,18 ; v1(2.5,19.5) C13.2@2.5,18 ; v1(4.75,18.5) C14.2@4.75,17.35 ; v1(6.05,39.5) C46.2@7.25,39.5 7.25,39.375 8,38.625 C45.2@8,37.5 ; v1(6.5,18) C11.2@6.5,17 ; R11.2@6.5,21.25 v1(6.5,22.5) ; v1(6.65,29.75) C49.2@7.65,29.75 C48.2@7.65,31.5 7.85,31.7 v1(7.85,34.5) 7.85,36.1 8,36.25 C45.2@8,37.5 ; v1(7.225,37.5) C45.2@8,37.5 ; v1(9,17) C11.2@6.5,17 ; C17.2@10.75,19.9 10.8,19.9 11,19.7 11,19.65 11.481,19.169 11.481,18.269 v1(11.5,18.25) C16.2@13,18.25 ; v1(11.5,15.5) C15.2@13,15.5 C16.2@13,18.25 ; v1(13,20) C16.2@13,18.25 ; v1(21.75,0.5) 23.22,0.5 C19.2@23.25,0.53 ; v1(21.75,3.25) 23.22,3.25 C18.2@23.25,3.28 ; C30.2@23.5,59.25 23.513,59.263 24.263,59.263 v1(24.275,59.275) ; C29.2@23.5,60.75 23.513,60.737 24.337,60.737 v1(24.35,60.75) ; U3.2@27,8.03 U3.3@27.95,8.03 ; v1(29,10.75) 28.985,10.765 C22.2@27.765,10.765 ; v1(29,13.25) 28.985,13.265 27.765,13.265 C21.2@27.75,13.28 C22.2@27.75,10.78 C22.2@27.765,10.765 ; v1(29.25,8.75) 29.223,8.75 28.778,8.305 28,8.305 27.95,8.255 U3.3@27.95,8.03 ; v1(43.25,33) C40.2@43.25,34.25 C39.2@46.75,34.25 v1(46.75,33) ; v1(45,69.9) 44.997,69.902 44.997,70.976 D1.2@44.995,70.979 44.997,70.982 44.997,71.998 v1(45,72) ; v1(54.475,70.75) C2.2@55.65,70.75 ; C13.2@2.5,18 2.751,17.749 3.501,17.749 3.7,17.55 4.55,17.55 C14.2@4.75,17.35 ; C14.2@4.75,17.35 4.85,17.25 5.5,17.25 5.7,17.05 6.45,17.05 C11.2@6.5,17 ; C22.2@27.765,10.765 27.9,10.63 27.9,8.08 U3.3@27.95,8.03
  Bottom Layer w1: v1(25.5,44.75) 24.425,44.75 C36.2@24.275,44.6 C35.2@24.275,47.4 ; v1(25.5,47.25) 24.425,47.25 C35.2@24.275,47.4 ; v1(25.5,50) 24.375,50 C34.2@24.275,50.1 C35.2@24.275,47.4
  other v1: 21.5,-20 29.5,-20 37.5,-20 53.5,-20 61.5,-20 69.5,-20 17.5,-12 25.5,-12 33.5,-12 49.5,-12 57.5,-12 65.5,-12 73.5,-12 46,-11 46,-10 42,-9 44,-9 45,-9 46,-9 -2.5,-4 5.5,-4 21.5,-4 29.5,-4 45.5,-4 53.5,-4 61.5,-4 69.5,-4 85.5,-4 -6.5,4 1.5,4 17.5,4 33.5,4 41.5,4 57.5,4 65.5,4 73.5,4 81.5,4 89.5,4 29.5,12 37.5,12 45.5,12 53.5,12 61.5,12 69.5,12 77.5,12 85.5,12 93.5,12 1.5,20 33.5,20 41.5,20 49.5,20 57.5,20 65.5,20 73.5,20 81.5,20 89.5,20 69.5,28 85.5,28 93.5,28 65.5,36 89.5,36 -2.5,44 5.5,44 53.5,44 61.5,44 85.5,44 93.5,44 61,46.75 61,47.75 65.5,52 81.5,52 72.7,52.95 73.8,52.95 72.7,54.05 73.8,54.05 69.5,60 23.525,62.95 78.25,64.25 62.25,65.25 62.25,66.5 49.5,68
  other v2: 19.75,-29 24.75,-29 29.75,-29 34.75,-29 39.75,-29 44.75,-29 49.75,-29 54.75,-29 59.75,-29 64.75,-29 69.75,-29 74.9,-28.975 15.1,-28.925 13.625,-19.725 76.4,-19.725 80.125,-11.675 9.875,-11.625 1.3,-6.6 88.675,-6.6 -9,-4.75 99,-4.75 -9,0.25 99,0.25 -9,5.25 99,5.25 -9,10.25 99,10.25 -9,15.25 99,15.25 -9,20.25 99,20.25 -9,25.25 99,25.25 -9,30.25 99,30.25 -9,35.25 99,35.25 -9,40.25 99,40.25 -9,45.25 99,45.25 -9,50.25 99,50.25 -9,54.75 99,54.75 91.45,56.125 1.3,56.55 84.25,58.25 9.85,61.65 76.5,68.75 13.625,69.75 75.75,74 15.25,78.75 22.5,79 30,79 37.5,79 65,79 70,79 74.925,79
NetC3_1: C3.1 L1.1 U1.19 U1.20
NetC3_2: C3.2 U1.21 | length 2.3
  Bottom Layer w0.2: C3.2@57.477,66.25 57.477,66.2 57.927,65.75 U1.21@59.5,65.75
NetC7_1: C7.1 U1.23 | length 3.9
  Top Layer w0.2: C7.1@57,68.5 v1(58.5,68.5)
  Bottom Layer w0.2: v1(58.5,68.5) 58.5,67.391 59.116,66.775 59.475,66.775 U1.23@59.5,66.75
NetC8_1: C8.1 D4.2 L2.2 U2.4
NetC8_2: C8.2 D2.2 D3.1
NetC9_2: C9.2 C10.2 C15.1 C16.1 D3.2 D4.1
NetC11_1: C11.1 C12.1 C13.1 C14.1 F2.2 L2.1 Q1.2 R10.1 U2.6 | length 8.7
  Bottom Layer w0.2: 7.271,8.843 7.271,4.229 8,3.5 R10.1@9,3.5 9.05,3.55 Q1.2@11,3.55
NetC17_1: C17.1 R12.2 | length 1.8
  Bottom Layer w0.2: R12.2@9,21.3 9.05,21.25 C17.1@10.75,21.25
NetC20_2: C20.2 R15.2 R16.1 U3.4 | length 6.2
  Bottom Layer w0.2: U3.4@27.95,5.73 R16.1@29.7,5.73 ; C20.2@29.35,1.5 29.35,2.35 29.5,2.5 29.5,3.2 R15.2@29.55,3.25 29.55,5.58 R16.1@29.7,5.73 ; R16.1@29.75,5.78 R16.1@29.7,5.73
NetC27_1: C27.1 U6.11 | length 3
  Bottom Layer w0.2: U6.11@62.675,47.25 64.5,47.25 65,47.75 C27.1@65,48.25
NetC28_2: C28.2 R22.2 R25.1 U7.4 | length 8.9
  Bottom Layer w0.3: C28.2@19.6,53.5 19.575,53.475 17.725,53.475 R22.2@17.7,53.45 R25.1@17.7,55.1 19.7,57.1 U7.4@22.2,57.1
NetC29_1: C29.1 C30.1 C31.1 L3.1 R21.2 U7.5 U7.7
NetC37_1: C37.1 C38.1 C41.1 R27.2 U8.1 U8.3 U8.4
NetC47_1: C47.1 U9.8 | length 2.1
  Bottom Layer w0.2: C47.1@5,36.1 5.05,36.1 5.9,35.25 U9.8@6.7,35.25
NetC47_2: C47.2 U9.7 | length 1.7
  Bottom Layer w0.2: C47.2@5,34.75 U9.7@6.7,34.75
NetC50_1: C50.1 U9.3 | length 3.3
  Bottom Layer w0.3: U9.3@9,34.25 10.574,34.25 10.75,34.074 10.75,33.55 11.3,33 C50.1@11.5,33
NetC51_1: C51.1 R41.2 U10.5 | length 3.4
  Bottom Layer w0.3: U10.5@39.95,-12.9 39.975,-12.925 39.975,-16.225 R41.2@40,-16.25
NetC51_2: C51.2 JP1.1 M1.2 Q6.1 U10.6 | length 7.5
  Bottom Layer w0.2: U10.6@39,-12.9 39,-12 39.148,-11.852 41.5,-11.852 43.148,-13.5 43.25,-13.5
  Bottom Layer w0.3: C51.2@39,-14.5 U10.6@39,-12.9
NetD1_1: D1.1 P1.A6 P1.B6 | length 5.1
  Top Layer w0.2: v1(44,72.25) 44,72.275 45.425,73.7 P1.A6@45.425,73.725 45.339,73.811 45.339,74.311 P1.B6@44.575,75.075
  Bottom Layer w0.2: v1(44,72.25) 44,71.024 D1.1@44.045,70.979
NetD1_3: D1.3 P1.A7 P1.B7 | length 5
  Bottom Layer w0.2: P1.B7@45.425,75.075 45.339,74.989 45.339,74.489 P1.A7@44.575,73.725 44.661,73.639 44.661,73.339 45.945,72.055 D1.3@45.945,70.979
NetD5_2: D5.2 F3.2 R20.1 R41.1 U6.6 U6.7 | length 91.8
  Top Layer w0.5: v1(44,-3.5) v1(44,-1.25) ; v1(52.5,26.75) v1(52.5,29.5)
  Bottom Layer w0.2: U6.6@59.325,48.05 U6.7@59.325,48.45 59.325,49.075 59.5,49.25 60.75,49.25 60.898,49.398 60.898,50.786 60.683,51 R20.1@59.9,51
  Bottom Layer w0.5: R41.1@40,-17.8 39.95,-17.75 37.75,-17.75 37.25,-17.25 37.25,-4.5 38.25,-3.5 v1(44,-3.5) ; v1(44,-1.25) 52.5,7.25 v1(52.5,26.75) ; v1(52.5,29.5) 52.5,31.574 52.324,31.75 49,31.75 48.426,32.324 48.426,35 48.5,35 49,35.5 51.25,35.5 51.75,36 51.75,41 55,44.25 55,49
NetF1_1: F1.1 P1.A4 P1.A9 P1.B4 P1.B9
NetF3_1: F3.1 M1.1
NetL3_2: L3.2 U7.2
NetLED1_1: LED1.1 R18.7 R18.8 | length 4
  Top Layer w0.2: LED1.1@74.25,60.604 v1(76.854,60.604)
  Bottom Layer w0.2: R18.7@75.508,60.604 R18.8@76.016,60.604 v1(76.854,60.604)
NetLED2_2: LED2.2 R33.2 | length 1.5
  Top Layer w0.2: R33.2@84,34.25 LED2.2@85.5,34.25
NetLED3_1: LED3.1 R34.2 | length 1.5
  Top Layer w0.2: R34.2@84,38.5 LED3.1@85.5,38.5
NetLED4_1: LED4.1 R35.2 | length 1.8
  Top Layer w0.2: LED4.1@72.24,43.45 72.29,43.5 R35.2@74,43.5
NetQ1_1: Q1.1 Q2.3 R10.2 | length 4.6
  Bottom Layer w0.2: R10.2@9,2.5 9.05,2.5 9.8,1.75 Q1.1@11,1.75 Q2.3@11,-0.5
NetQ2_1: Q2.1 R13.2 | length 2.1
  Bottom Layer w0.2: Q2.1@11.9,-2.5 R13.2@14,-2.5
NetQ3_2: Q3.2 R26.2 | length 2.9
  Bottom Layer w0.2: R26.2@85.137,34.387 R26.2@85.3,34.55 ; R26.2@85.15,34.4 Q3.2@85.15,37.05
NetQ3_5: Q3.5 Q3.6 R23.2 | length 3.3
  Bottom Layer w0.2: Q3.5@85.15,39.25 Q3.6@85.8,39.25 ; Q3.6@85.616,38.15 85.8,38.334 Q3.6@85.8,39.25 ; R23.2@85.75,40.75 85.8,40.7 Q3.6@85.8,39.25
NetQ4_2: Q4.2 R32.2 | length 1.7
  Bottom Layer w0.2: Q4.2@67.25,44.25 R32.2@67.25,46
NetQ4_5: Q4.5 Q4.6 R29.2 | length 4.4
  Bottom Layer w0.2: R29.2@64.25,43 R29.2@64.4,43.15 Q4.6@66.784,43.15 66.6,42.966 Q4.6@66.6,42.05 Q4.5@67.25,42.05
NetQ5_1: Q5.1 R37.2 U9.6 | length 7.9
  Bottom Layer w0.2: R37.2@1.25,36.5 Q5.1@1.25,34.25 2.25,34.25 2.5,34 5.75,34 6,34.25 U9.6@6.7,34.25
NetQ5_3: Q5.3 R39.2 | length 2
  Bottom Layer w0.2: Q5.3@2.2,32 2.2,30.05 R39.2@2.25,30
NetQ6_2: Q6.2 U10.1 | length 6.7
  Bottom Layer w0.2: U10.1@39,-10.5 39,-11.383 39.117,-11.5 41.75,-11.5 43.385,-13.135 Q6.2@44.125,-13.135
NetQ6_3: Q6.3 U10.3 | length 3.4
  Bottom Layer w0.2: U10.3@40.9,-10.5 42.25,-10.5 42.5,-10.25 44.05,-10.25 44.125,-10.325 Q6.3@44.125,-10.365
NetR3_2: R3.2 U1.6 | length 1.6
  Bottom Layer w0.2: U1.6@62.75,68 62.775,68.025 62.775,68.525 63,68.75 R3.2@63,69.528
NetR4_2: R4.2 R5.1 U1.11 | length 7.3
  Top Layer w0.2: R4.2@62.525,64 64.642,64 64.892,64.25 v1(65,64.25)
  Bottom Layer w0.2: U1.11@63.5,65.25 63.525,65.225 64.025,65.225 v1(65,64.25) 65.05,64.3 R5.1@67.75,64.3
NetR6_1: R6.1 U1.8 | length 2.4
  Bottom Layer w0.2: U1.8@63.5,66.75 R6.1@65.9,66.75
NetR6_2: R6.2 R8.1 | length 1.7
  Bottom Layer w0.2: R6.2@65.9,68.3 R8.1@67.6,68.3
NetR7_1: R7.1 U1.10 | length 7.3
  Bottom Layer w0.2: U1.10@63.5,65.75 64.75,65.75 65.25,65.25 69.5,65.25 69.75,65 R7.1@69.75,64.3
NetR9_2: R9.2 R11.1 U2.1 | length 4.9
  Bottom Layer w0.2: R9.2@4.75,19.7 R11.1@6.5,19.7 7.55,19.7 8.35,18.9 U2.1@8.35,17.975
NetR12_1: R12.1 U2.2 | length 1.8
  Bottom Layer w0.2: U2.2@9,17.975 R12.1@9,19.75
NetR17_2: R17.2 U4.1 | length 207.8
  Top Layer w0.2: v1(70.75,55.5) 71.5,56.25 75.5,56.25 75.802,56.25 v1(75.807,56.245)
  Bottom Layer w0.2: 15.27,-18.511 14.755,-16.128 cw(c14.95,-16.086) 14.75,-16.086 14.75,-5.75 15.5,-5 U4.1@20.5,-5 ; 15.27,-18.512 cw(c14.582,-18.663) 15.278,-18.555 16.546,-26.557 ccw(c16.743,-26.525) 16.743,-26.725 73.542,-26.725 ccw(c73.542,-26.525) 73.739,-26.558 74.745,-20.545 74.747,-20.537 74.751,-20.519 74.752,-20.517 74.757,-20.494 75.348,-17.539 75.349,-17.534 75.48,-17.009 cw(c90.915,-20.866) 87.112,-5.418 87.788,-5.251 cw(c87.837,-5.446) 87.797,-5.25 cw(c90.993,-20.926) 87.85,-5.239 87.854,-5.238 96.5,-3.869 96.5,50.95 93.552,53.898 82.852,53.898 80.505,56.245 v1(75.807,56.245) ; R17.2@67.75,54.5 67.75,55.25 68,55.5 v1(70.75,55.5)
NetR28_2: R28.2 R31.1 U8.7 | length 4.3
  Bottom Layer w0.2: U8.7@60,37.45 R31.1@60,39.75 R28.2@62,39.75
NetR36_2: R36.2 R38.1 U9.5 | length 5.2
  Bottom Layer w0.2: R36.2@5.5,29.5 R38.1@5.5,30.75 6.25,30.75 6.5,31 6.5,33 6.75,33.25 6.75,33.725 6.725,33.75 U9.5@6.7,33.75
NetR38_2: R38.2 R40.1 | length 1.5
  Bottom Layer w0.2: R40.1@4,31.75 R38.2@5.5,31.75
NetR42_1: R42.1 U10.2 | length 2
  Bottom Layer w0.2: U10.2@39.95,-10.5 40,-10.45 R42.1@40,-8.5
NetRT1_1: RT1.1 U6.1 | length 2.9
  Bottom Layer w0.2: RT1.1@56.75,46 56.75,46.25 56.95,46.05 U6.1@59.325,46.05
PWR_BOARD_SPARE_2: P2.6
PWR_BOARD_SPARE_3: P2.7
REGN: C5.1 R4.1 REGN1.TP U1.22 | length 12.1
  Top Layer w0.2: v1(58.5,66.5) 58.5,64.5 59,64 R4.1@60.975,64 REGN1.TP@60.975,62.025 REGN1.TP@61,62
  Bottom Layer w0.2: C5.1@55.25,68.5 55.5,68.25 57.181,68.25 57.802,67.629 57.802,67.232 58.5,66.534 v1(58.5,66.5) 58.608,66.5 58.857,66.252 U1.22@59.5,66.25 U1.22@59.5,66.25
USB_CC1_2: P1.A5 R2.1 | length 3.2
  Bottom Layer w0.2: P1.A5@46.275,73.725 46.361,73.639 46.361,73.139 47.5,72 R2.1@47.5,71
USB_CC2_2: P1.B5 R1.1 | length 6.1
  Top Layer w0.2: v1(42,72.25) 41.448,72.802 41.448,74.248 41.6,74.4 43.05,74.4 P1.B5@43.725,75.075
  Bottom Layer w0.2: R1.1@42,71 v1(42,72.25)
USB_D+: D1.6 D+.TP U1.3 | length 29.9
  Top Layer w0.2: D+.TP@42.525,67.25 v1(44,67.25) 44,70.219 46.584,72.802 61.448,72.802 v1(62.25,72)
  Bottom Layer w0.2: v1(44,67.25) 44,68.534 D1.6@44.045,68.579 ; U1.3@61.25,68 61.25,71 v1(62.25,72)
USB_D-: D1.4 D-.TP U1.4 | length 26
  Top Layer w0.2: D-.TP@47.425,67.2 47.375,67.25 v1(46,67.25) 46,70.5 47,71.5 61.5,71.5 v1(62.25,70.75)
  Bottom Layer w0.2: D1.4@45.945,68.579 46,68.524 v1(46,67.25) ; U1.4@61.75,68 61.75,70.25 v1(62.25,70.75)
V_CHG_USB_PROT: C1.1 C2.1 D1.5 F1.2 U1.1 U1.24 VBUS.TP | length 15.9
  Top Layer w0.2: VBUS.TP@45,65.75 v1(45,67.25) 44.448,67.802 44.448,70.129 44.819,70.5 45,70.5 46.75,72.25 v1(53.5,72.25)
  Bottom Layer w0.2: D1.5@44.995,68.579 45,68.574 v1(45,67.25)
V_SYS: C4.1 F2.1 L1.2 R21.1 U1.15 U1.16 V_SYS.TH_TP | length 102.6
  Bottom Layer w0.5: F2.1@-4,17.91 -4,20.25 -7,23.25 -7,52 -7,52.9 -5.999,53.901 0.792,54.986 0.794,54.986 ccw(c-2.313,73.528) 16.115,69.809 16.117,69.818 16.629,73 39.272,73 40.356,71.894 cw(c40,71.543) 40.5,71.543 40.5,66.5 41.238,65.762 42.738,65.762 42.75,65.75
VBAT_PROT: C6.1 R20.2 U1.13 U1.14 U6.10 | length 7.8
  Bottom Layer w0.2: R20.2@62.25,51 61.5,51 61.25,50.75 61.25,49.5 61.5,49.25 63.75,49.25 64,49 64,48 63.65,47.65 U6.10@62.675,47.65
pads on no net: M1.6 P1.A8 P1.B8 P1.P2 P1.P3 P1.P4 P2.11 Q6.5 U1.2 U1.12 U5.5 U5.6 U5.8 U6.2 U6.3 U6.4 U6.5 U6.9 U8.2 U10.4
copper on no net:
  other v1: 76.75,-3.476

## Polygon pours and split planes (outlines as drawn)
NetL3_2 on Bottom Layer "NETL3_2_L02_P301" (solid, remove dead copper, pour order 301): 30.25,52.75 30.25,56.75 22.5,56.75 22.5,54.25 23.5,54.25 23.5,56 25.5,56 25.5,52.75
+5V on Bottom Layer "+5V_L02_P319" (solid, remove dead copper, pour order 319): 52.5,27.5 15,27.5 15,32.5 7.5,32.5 7.5,58.75 52.5,58.75
GND on Bottom Layer "GND_L02_P320" (solid, remove dead copper, pour order 320): 110,87.5 110,-37.5 -30,-37.5 -30,87.5
3V3 on Bottom Layer "3V3_L02_P317" (solid, remove dead copper, pour order 317): 83,47 83,36 71,36 60,36 60,43 79,43 79,47
VBAT_PROT on Bottom Layer "VBAT_PROT_L02_P306" (solid, remove dead copper, pour order 306): 61,49 61,58 62,58 62,65 64.5,65 64.5,49
NetC29_1 on Bottom Layer "NETC29_1_L02_P318" (solid, remove dead copper, pour order 318): 41.4,72.672 41.4,56.75 23.979,56.75 23.979,56.523 23.273,56.523 16,56.523 16,72.672
NetF3_1 on Bottom Layer "NETF3_1_L02_P313" (solid, remove dead copper, pour order 313): 46.75,58 46.75,46.75 39.25,46.75 39.25,58
NetC51_2 on Bottom Layer "NETC51_2_L02_P309" (solid, remove dead copper, pour order 309): 48,-12 48,-25 43,-25 42.5,-24.5 42.5,-12
+5V on Bottom Layer "+5V_L02_P298" (solid, remove dead copper, pour order 298): 85.25,41.75 85.25,38.735 77.485,38.735 76.75,38 76,38 76,39 79.5,39 79.5,41.75
+5V_SW on Bottom Layer "+5V_SW_L02_P299" (solid, remove dead copper, pour order 299): 85.25,36 78.75,36 78.75,39 85.25,39
NetC37_1 on Bottom Layer "NETC37_1_L02_P307" (solid, remove dead copper, pour order 307): 61.5,35.5 61.5,31.75 47.75,31.75 47.75,35.5
GND on Bottom Layer "GND_L02_P308" (solid, remove dead copper, pour order 308): 69.5,32.75 61.5,32.75 61.5,35.5 51.75,35.5 51.75,38.75 57.75,38.75 57.75,37 69.5,37
NetD5_2 on Bottom Layer "NETD5_2_L02_P310" (solid, remove dead copper, pour order 310): 61,53 61,48 46,48 46,53
3V3_SW on Bottom Layer "3V3_SW_L02_P305" (solid, remove dead copper, pour order 305): 79,47 67.25,47 67.25,43 79,43
49V2 on Bottom Layer "49V2_L02_P312" (solid, remove dead copper, pour order 312): 19.5,19.75 19.5,11.5 22.25,11.5 22.25,6.75 26.5,6.75 26.75,7 26.75,19.75
NetC8_2 on Bottom Layer "NETC8_2_L02_P300" (solid, remove dead copper, pour order 300): 22,11.5 14.5,11.5 14.5,8.5 22,8.5
NetC9_2 on Bottom Layer "NETC9_2_L02_P304" (solid, remove dead copper, pour order 304): 19.5,19.75 19.5,11.5 14.5,11.5 14.5,19.75
NetC11_1 on Bottom Layer "NETC11_1_L02_P311" (solid, remove dead copper, pour order 311): 8.75,16.5 8.75,8.5 5.25,8.5 5.25,12.25 -6.75,12.25 -6.75,16.5
NetC8_1 on Bottom Layer "NETC8_1_L02_P303" (solid, remove dead copper, pour order 303): 10.5,16.5 10.5,15 12,15 12,14.25 14.5,14.25 14.5,8.5 8.75,8.5 8.75,16.5
GND on Bottom Layer "GND_L02_P297" (solid, remove dead copper, pour order 297): 23.479,56.688 23.479,57.879 23.5,57.9 25.225,57.9 25.225,61.3 25.9,61.3 25.9,64.3 22.9,64.3 22.9,56.708 22.921,56.688
V_SYS on Bottom Layer "V_SYS_L02_P316" (solid, pour order 316): 62,67 41.5,67 41.5,58.5 62,58.5
NetC3_1 on Bottom Layer "NETC3_1_L02_P302" (solid, remove dead copper, pour order 302): 60,62.875 53.85,62.875 53.85,67 60,67
V_CHG_USB_PROT on Bottom Layer "V_CHG_USB_PROT_L02_P315" (solid, remove dead copper, pour order 315): 62.25,67 54.75,67 53.25,68.5 53.25,79.75 62.25,79.75
NetF1_1 on Bottom Layer "NETF1_1_L02_P314" (solid, remove dead copper, pour order 314): 53,80 53,73 40,73 40,80
GND on Top Layer "GND_L01_P295" (solid, remove dead copper, pour order 295): -12.5,87.5 -12.5,-35 112.5,-35 112.5,87.5

## Keep-outs
Keep-Out Layer: